# Allegro board ACCelero.brd
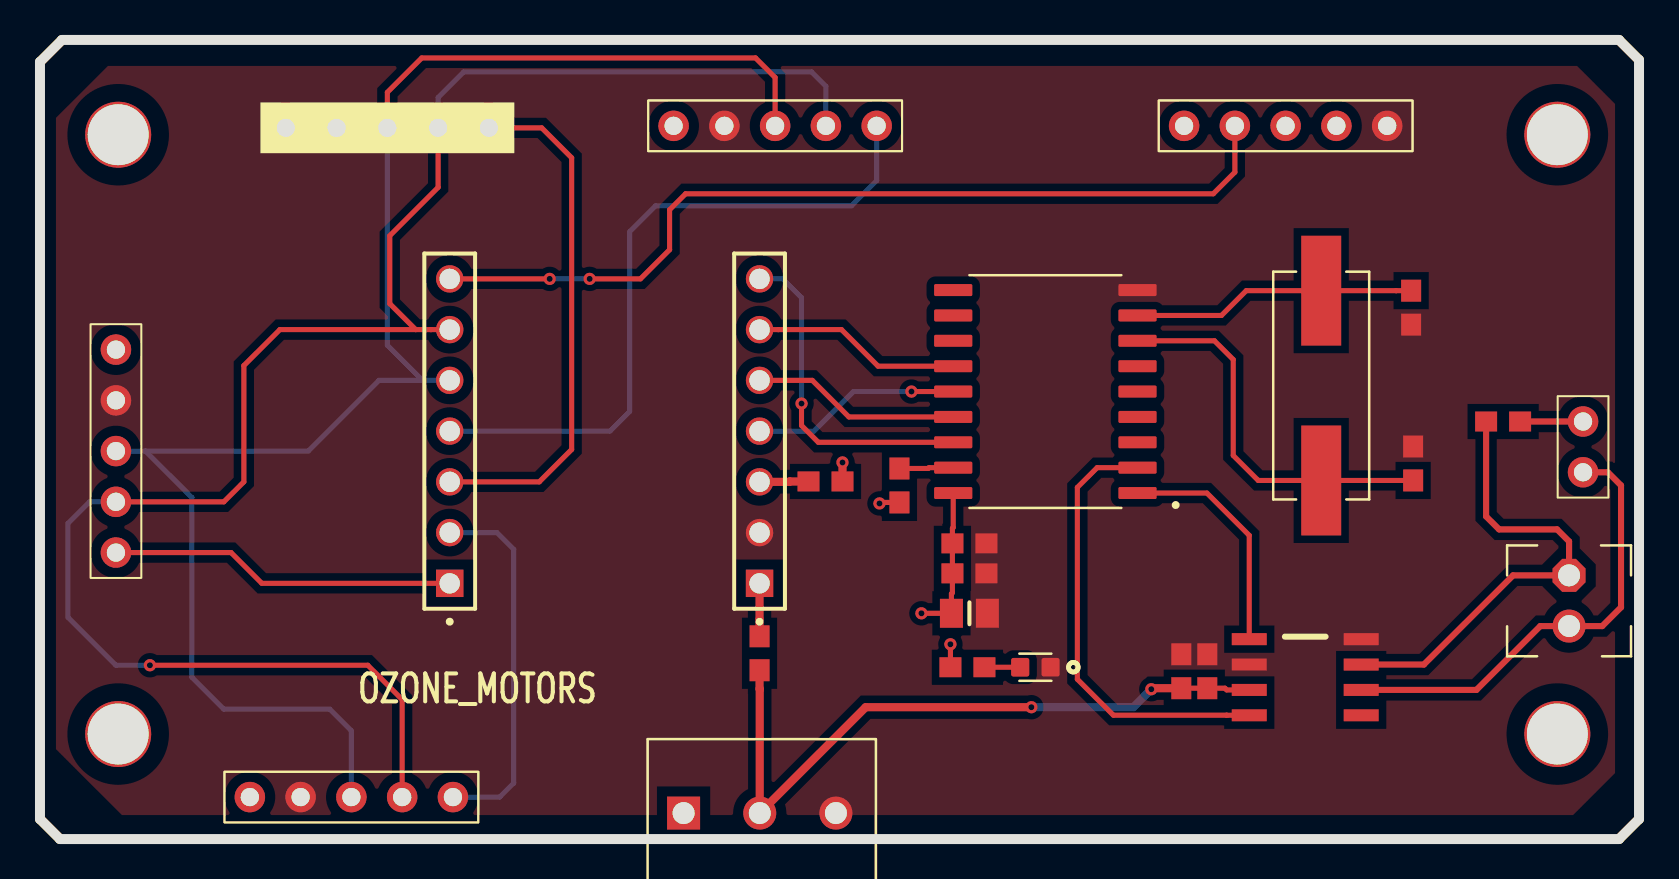
[diagram p0: board, top side]
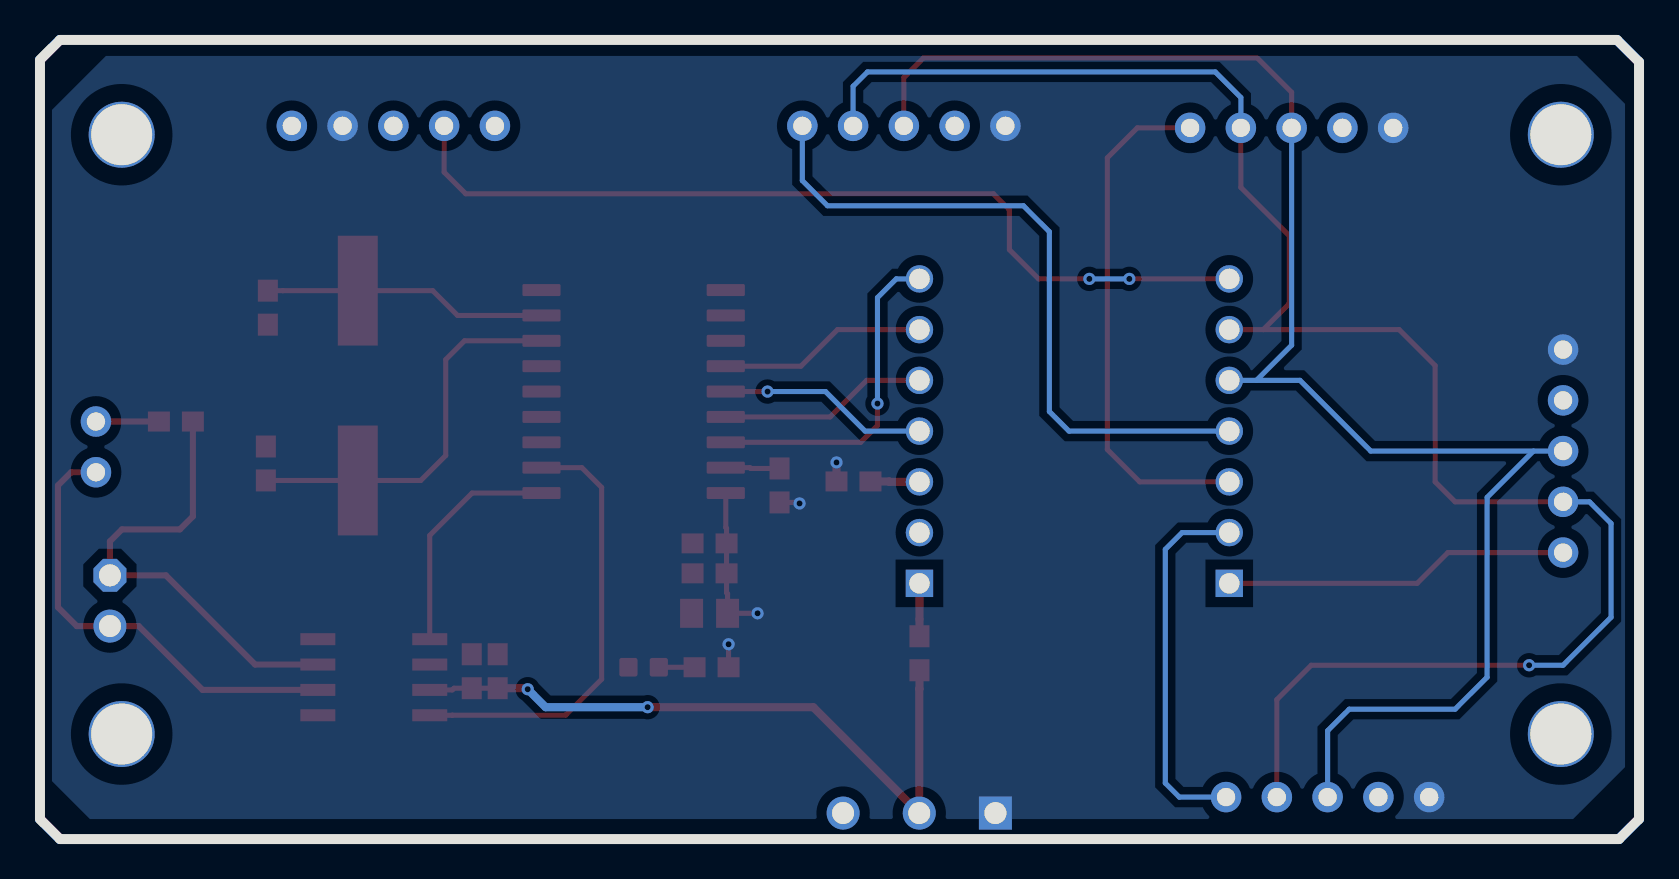
[diagram p1: board, bottom side, seen from below]

Outline 80 x 40 mm; copper layers: TOP, BOTTOM. Coordinates in mm from the lower left corner of the outline.
Outline path: 0,1 0,39 1,40 79,40 ; 0,1 0,38.9 1.1,40 79,40 ; 0,1 1,0 ; 0,1 1,0 ; 79,40 80,39 ; 79,40 80,39 ; 1,0 79,0 ; 1,0 79,0 ; 80,39 80,1 ; 80,39 80,1 ; 79,0 80,1 ; 79,0 80,1

## Placement (name value [footprint] x y rotation side)
C1  22PF  [0603]  68.7 18.8 270 top
C2  22PF  [0603]  68.6 26.6 90 top
C3  10UF  [0805]  46.5 11.3 0 top
C4  0.1UF  [0603]  46.5 13.3 0 top
C5  0.1UF  [0603]  46.5 14.8 0 top
C7  0.1UF  [0603]  58.4 8.4 90 top
C8  0.1UF  [0603]  57.1 8.4 90 top
D1  LED  [LEDC1608X65N]  49.8 8.6 180 top
J1  XIAO  [SAMTEC_DW-07-10-G-S-630]  20.5 12.8 90 top
J2  XIAO  [SAMTEC_DW-07-10-G-S-630]  36 12.8 90 top
J3  ACC1  [JUMPER5]  3.8 24.5 270 top
J4  ACC2  [JUMPER5]  10.5 2.1 0 top
J5  ACC3  [JUMPER5]  12.3 35.6 0 top
J6  ACC4  [JUMPER5]  31.7 35.7 0 top
J7  CON2  [1725656]  76.5 13.2 270 top
J8  CON2  [JUMPER2]  77.2 20.9 270 top
J10  Piezo  [JUMPER5]  67.4 35.7 180 top
J11  CON3  [PHOENIX_1985836]  32.2 1.3 0 top
NOREF  -  [unnamed]  3.9 5.5 0 top
NOREF#2  -  [unnamed]  75.9 5.5 0 top
NOREF#3  -  [unnamed]  75.9 35.5 0 top
NOREF#4  -  [unnamed]  3.9 35.5 0 top
R1  10K  [0603]  43 17.7 270 top
R2  120R  [0603]  73.2 20.9 0 top
R3  1k  [0603]  46.4 8.6 0 top
R4  0 ohms  [0603]  36 9.3 270 top
R5  0Ohms  [0603]  39.3 17.9 180 top
U1  MCP2515  [SOIC127P1030X265-18N]  50.3 22.4 180 top
U10  TJA1050  [SOP8]  63.3 8.1 270 top
Y1  8MZ  [XTAL_ECS-080-20-5PX-TR]  64.1 22.7 270 top

## Library data of the parts
C1 C2 C4 C5 C7 C8 = CAP NP
C3 = CAP
D1 = LED_1
J1 = CON7_3
J2 = CON7_5
J3-J5 J10 = CON5_0
J6 = CON5_1
J7 J8 = CON2_0
J11 = CON3_1
R1-R5 = R
U1 = MCP2515_0
U10 = TPS563200_1
Y1 = CRYSTAL_0

## Footprints (pads in the part's own frame, mm; a bottom-side part is the same pattern mirrored in y, then rotated)
0603
  rect 1.1x1 smd: 1(-0.85,0) 2(0.85,0)
0805
  rect 1.15x1.45 smd: 1(-0.9,0) 2(0.9,0)
1725656
  rrect 1.65x1.65 hole 1.1: 1(0,0)
  round 1.65 hole 1.1: 2(2.54,0)
JUMPER2
  round 1.524 hole 0.914: 1(0,0) 2(2.54,0)
JUMPER5
  round 1.524 hole 0.914: 1(0,0) 2(2.54,0) 3(5.08,0) 4(7.62,0) 5(10.16,0)
LEDC1608X65N
  custom 0.91x0.93 smd: A(0.76,0) C(-0.76,0)
PHOENIX_1985836
  rect 1.65x1.65 hole 1.1: 1(0,0)
  round 1.65 hole 1.1: 2(3.81,0) 3(7.62,0)
SAMTEC_DW-07-10-G-S-630
  rect 1.37x1.37 hole 1.02: 01(0,0)
  round 1.37 hole 1.02: 02(2.54,0) 03(5.08,0) 04(7.62,0) 05(10.16,0) 06(12.7,0) 07(15.24,0)
SOIC127P1030X265-18N
  custom 1.91x0.6 smd: 1(-4.61,5.08) 2(-4.61,3.81) 3(-4.61,2.54) 4(-4.61,1.27) 5(-4.61,0) 6(-4.61,-1.27) 7(-4.61,-2.54) 8(-4.61,-3.81) 9(-4.61,-5.08) 10(4.61,-5.08) 11(4.61,-3.81) 12(4.61,-2.54) 13(4.61,-1.27) 14(4.61,0) 15(4.61,1.27) 16(4.61,2.54) 17(4.61,3.81) 18(4.61,5.08)
SOP8
  rect 0.6x1.75 smd: 1(-1.905,-2.8) 2(-0.635,-2.8) 3(0.635,-2.8) 4(1.905,-2.8) 5(1.905,2.8) 6(0.635,2.8) 7(-0.635,2.8) 8(-1.905,2.8)
unnamed
  round 3.302 hole 3.048: (0.013,-0.244)
XTAL_ECS-080-20-5PX-TR
  rect 5.5x2 smd: 1(-4.75,0) 2(4.75,0)

## Nets
3V3: C3.1 C4.1 C5.1 J3.1 J4.1 J5.1 J6.1 J10.2 J11.1 R1.2 R3.1 R5.1 U1.18(VDD)
5VCC: C7.1 C8.1 J11.2 R4.2 U10.3(VDD)
GND: C1.1 C2.1 C3.2 C4.2 C5.2 C7.2 C8.2 D1.C J2.02 J3.2 J4.2 J5.2 J6.2 J10.1 J11.3 U1.9(VSS) U10.2(VSS) U10.8(RS)
CS: J2.07 U1.16(CS)
D0/A0: J1.01 J3.5
D1/A1: J1.02 J4.5
D2/A2: J1.03 J5.5
D3/A3: J1.04 J6.5
INT: U1.12(INT)
MISO: J2.05 U1.15(SO)
MOSI: J2.04 U1.14(SI)
OSC1: C2.2 U1.8(OSC1) Y1.1
OSC2: C1.2 U1.7(OSC2) Y1.2
RXD: U1.2(RC) U10.4(RXD)
SCK: J2.06 U1.13(SCK)
SCL: J1.06 J3.4 J4.4 J5.4 J6.4
SDA: J1.05 J3.3 J4.3 J5.3 J6.3
TX: J1.07 J10.4
TXD: U1.1(TC) U10.1(TXD)
N21207: J2.01 R4.1
N21518: R1.1 U1.17(RESET)
N21845: J7.1 R2.1 U10.7(CANH)
N21867: J7.2 J8.2 U10.6(CANL)
N21960: J8.1 R2.2
N23393: D1.A R3.2
N62830: J2.03 R5.2

Pads without a net: J10 3 5; U1 3 4 5 6 10 11; U10 5

## Via types
v1: diameter 0.61, hole 0.305, TOP to BOTTOM, 11 vias

## Routing (per net, layer and track width the routed paths; a pad name or vN(x,y) marks a point on that pad's centre or on a via; arc(x,y) is an arc through that point)
3V3: length 10.7
  TOP w0.254: v1(44.1,11.3) C3.1 45.6,12.28 45.65,12.33 C4.1 C5.1 45.65,15.55 45.69,15.59 U1.18 ; R3.1 v1(45.55,9.75) ; v1(42,16.8) 42.05,16.85 R1.2
  TOP w0.406: R5.1 v1(40.15,18.85)
5VCC: length 34.3
  TOP w0.254: C8.1 C7.1 59.29,7.55 59.37,7.46 U10.3
  TOP w0.406: C8.1 55.65,7.55 v1(55.6,7.5) ; R4.2 36,7.52 36.01,7.51 J11.2 41.31,6.6 v1(49.6,6.6)
  BOTTOM w0.406: v1(55.6,7.5) 54.7,6.6 v1(49.6,6.6)
CS: length 16.8
  TOP w0.254: v1(38.1,21.8) 38.1,20.7 38.94,19.86 U1.16
  BOTTOM w0.254: J2.07 37.16,28.04 38.1,27.1 v1(38.1,21.8)
D0/A0: length 17.3
  TOP w0.254: J1.01 11.1,12.8 9.56,14.34 J3.5
D1/A1: length 18.6
  BOTTOM w0.254: J4.5 23,2.1 23.7,2.8 23.7,14.5 22.86,15.34 J1.02
D2/A2: length 26.1
  TOP w0.254: J1.03 24.98,17.88 26.6,19.5 26.6,34.1 25.1,35.6 J5.5
D3/A3: length 34.6
  BOTTOM w0.254: J6.5 41.86,32.96 40.6,31.7 30.8,31.7 29.5,30.4 29.5,21.4 28.52,20.42 J1.04
MISO: length 10.4
  TOP w0.254: U1.15 40.47,21.13 38.64,22.96 J2.05
MOSI: length 10.5
  TOP w0.254: U1.14 v1(43.6,22.4)
  BOTTOM w0.254: J2.04 38.72,20.42 40.7,22.4 v1(43.6,22.4)
OSC1: length 14.2
  TOP w0.254: C2.2 67.85,27.45 Y1.1 60.35,27.45 59.11,26.21 U1.8
OSC2: length 19.5
  TOP w0.254: C1.2 Y1.2 60.95,17.95 59.7,19.2 59.7,24 58.76,24.94 U1.7
RXD: length 22.4
  TOP w0.254: U1.2 52.89,18.59 51.9,17.6 51.9,8 53.7,6.2 59.37,6.2 59.37,6.19 U10.4
SCK: length 10.4
  TOP w0.254: J2.06 36.94,25.5 40.1,25.5 41.93,23.67 U1.13
SCL: length 89.9
  TOP w0.254: 18.8,25.5 19.56,25.5 J1.06 ; 18.8,25.5 17.5,26.8 17.5,30.2 19.92,32.62 J5.4 ; 18.8,25.5 12,25.5 10.2,23.7 10.2,17.88 9.2,16.88 J3.4 ; v1(5.5,8.7) 16.4,8.7 18.12,6.98 J4.4
  BOTTOM w0.254: v1(5.5,8.7) 3.8,8.7 1.4,11.1 1.4,15.8 2.48,16.88 J3.4 ; J6.4 39.32,37.68 38.6,38.4 21.2,38.4 19.92,37.12 J5.4
SDA: length 80.9
  TOP w0.254: J5.3 17.38,37.38 19.1,39.1 35.8,39.1 36.78,38.12 J6.3
  BOTTOM w0.254: 5.28,19.42 7.6,17.1 7.6,8.1 9.2,6.5 14.5,6.5 15.58,5.42 J4.3 ; 5.28,19.42 J3.3 ; 5.28,19.42 13.42,19.42 16.96,22.96 19.14,22.96 ; 19.14,22.96 J1.05 ; 19.14,22.96 17.38,24.72 J5.3
TX: length 45
  TOP w0.254: v1(27.5,28.04) 30.04,28.04 31.5,29.5 31.5,31.5 32.3,32.3 58.7,32.3 59.78,33.38 J10.4 ; J1.07 v1(25.5,28.04)
  BOTTOM w0.254: v1(25.5,28.04) v1(27.5,28.04)
TXD: length 11.7
  TOP w0.254: U1.1 58.38,17.32 60.5,15.2 U10.1
N21207: length 2.7
  TOP w0.406: J2.01 36,11 R4.1
N21518: length 2.7
  TOP w0.254: U1.17 44.48,18.59 44.44,18.55 R1.1
N21845: length 23.4
  TOP w0.305: R2.1 72.35,16.15 73,15.5 75.9,15.5 76.5,14.9 J7.1 73.7,13.2 69.23,8.73 U10.7
N21867: length 23
  TOP w0.305: U10.6 71.86,7.46 75.06,10.66 J7.2 78.16,10.66 79.1,11.6 79.1,17.7 78.44,18.36 J8.2
N21960: length 3.1
  TOP w0.305: R2.2 J8.1
N23393: length 1.8
  TOP w0.254: R3.2 D1.A
N62830: length 2.5
  TOP w0.406: J2.03 37.5,17.88 37.52,17.9 R5.2

## Copper pours and planes (outline as drawn; the poured copper is in the pictures)
3V3 on BOTTOM: 0.7,36.8 3.1,39.2 76.7,39.2 79.4,36.5 79.4,2.9 77.5,1 3.3,1 0.7,3.6
GND on TOP: 3.4,38.7 76.9,38.7 78.8,36.8 78.8,3.3 76.7,1.2 4.1,1.2 0.8,4.5 0.8,36.1

## Text on the board
Ref Des/Silkscreen Top: OZONE_MOTORS
NCLEGEND-1-2: FIGURE | SIZE | 12.0 | 36.0 | 40.157 | 43.307 | 120.0 | DRILL CHART: TOP to BOTTOM | ALL UNITS ARE IN MILS | TOLERANCE | +3.0/-12.0 | +0.0/-0.0 | PLATED | QTY | 11 | 27 | 14 | 5 | 4
